# Altium PCB Shopping_Cart.PcbDoc (part 2 of 2)
Units mil, origin at the board's own origin, x right, y up, seen from the top; angles counter-clockwise.
Board outline 3350 x 1865 mil, 2 copper layers (Top Layer, Bottom Layer); 76 components, 56 nets, 246 pads, 179 vias.
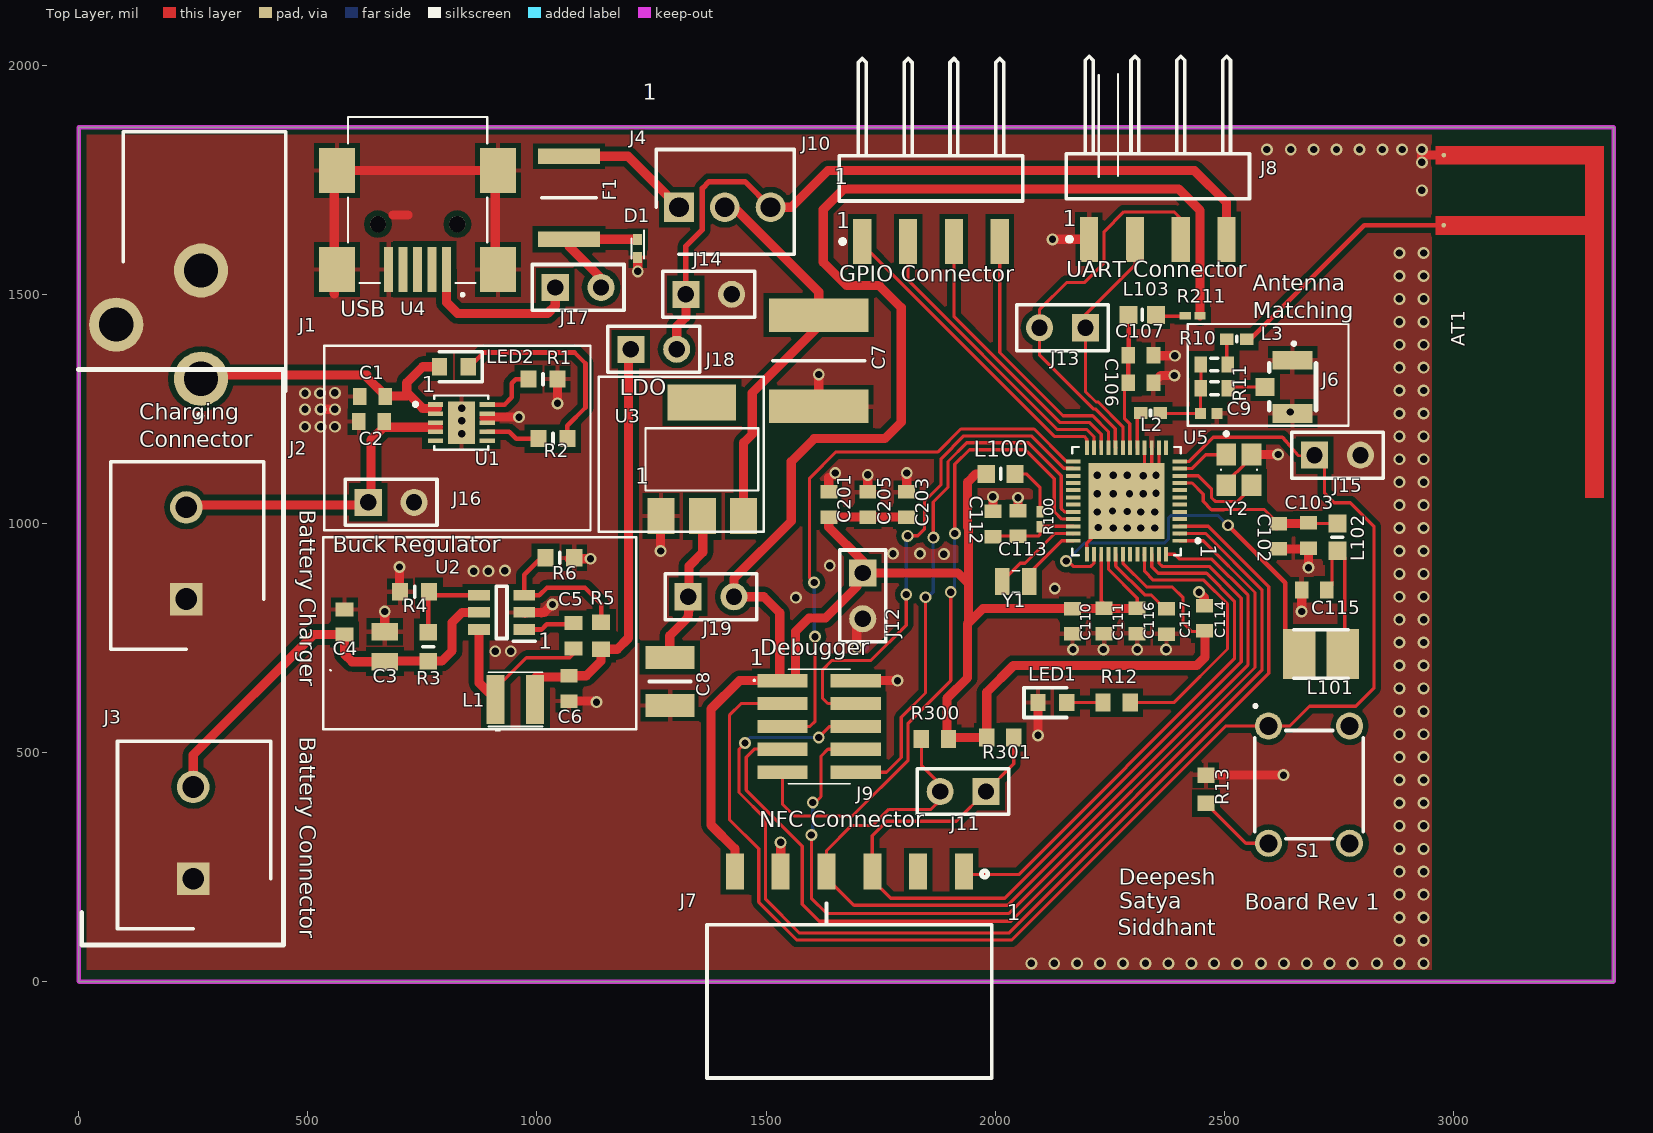
[diagram p0: Top Layer view]

## Silkscreen, mask and mechanical layers (free items; w line width, h text height) (continued)
Top Overlay: (continued)
  lines w5: 549,680 550,679 ; 2226,1756 2226,1978 ; 2268,1758 2268,1980 ; 2420,1280 2420,1213 2528.38,1213 2771,1213 2771,1435 2467,1435 2420,1435 2420,1396.25 ; 2420.04,1277.35 2420.04,1395.25 ; 534,551 534,970 1110,970 1130,970 1217,970 1217,551 534,551 ; 536,985 1117,985 1117,1388 536,1388 536,985 ; 1135,982 1232,982 1495,982 1495,1320 1190,1320 1135,1320 1135,982
  lines w10: -1,1336 447,1336 447,80 7,80 7,151
  text "1" at 1231,1913 h60
  text "1" at 1649,1728 h60
  text "1" at 2147,1637 h60
  text "1" at 1653,1632 h60
  text "UART Connector" at 2155.61,1525.61 h60
  text "GPIO Connector" at 1660,1515 h60
  text "USB" at 571,1439 h60
  text "Antenna  / Matching" at 2562,1436 h60
  text "1" at 749,1274 h60
  text "LDO" at 1181,1268 h60
  text "Charging  / Connector" at 132,1154 h60
  text "1" at 1215,1075 h60
  text "Battery Charger" at 470,1030 h60 r270
  text "1" at 2437,955 h60 r270
  text "Buck Regulator" at 555,925 h60
  text "1" at 1003,714 h60
  text "Debugger" at 1487,700 h60
  text "1" at 1464,679 h60
  text "Battery Connector" at 470,535 h60 r270
  text "NFC Connector" at 1485,325 h60
  text "Deepesh" at 2270,200 h60
  text "Satya" at 2271,147 h60
  text "Board Rev 1" at 2545,145 h60
  text "1" at 2025,122 h60
  text "Siddhant" at 2267,89 h60
Bottom Overlay:
  text "PD12" at 1735,1830 h60 r90
  text "PD15" at 2040,1830 h60 r90
  text "PD13" at 1840,1825 h60 r90
  text "PD14" at 1935,1825 h60 r90
  text "1-2  VUSB / 2-3 BUCK" at 1266,1815.98 h60 r180
  text "GND" at 2225,1795 h60 r90
  text "TX" at 2320,1795 h60 r90
  text "RX" at 2430,1795 h60 r90
  text "5V" at 2525,1790 h60 r90
  text "USB ISO" at 980,1596 h60 r180
  text "5V" at 1279,1582 h60 r180
  text "GND" at 1386,1577 h60 r180
  text "U-TX" at 2017,1520 h60 r180
  text "U-RX" at 2160,1519 h60 r180
  text "5V  ISO" at 1169,1458 h60 r180
  text "RESET" at 2561,1228 h60 r180
  text "GND" at 2752,1223 h60 r180
  text "VBAT+" at 30,1152 h60 r180
  text "VBAT ISO" at 578,1128 h60 r180
  text "GND" at 45,954 h60 r180
  text "3V3" at 1671,947 h60 r90
  text "3V3 ISO" at 1284,944 h60 r180
  text "GND" at 1670,836 h60 r90
  text "VIN" at 46,519 h60 r180
  text "SCL" at 1937,496 h60 r180
  text "SDA" at 1809,494 h60 r180
  text "GND" at 37,313 h60 r180
  text "GND" at 1550,189 h60 r90
  text "3V3" at 1451,185 h60 r90
  text "SDA" at 1649,178 h60 r90
  text "SCL" at 1753,178 h60 r90
  text "VOUT" at 1851,170 h60 r90
  text "FD" at 1959,167 h60 r90
Mechanical 16:
  drawing of 1873 lines, arcs and shapes, not listed
  text "1" at -454,3338 h78.74
  text "2" at 2406,3338 h78.74
  text "3" at 5286,3338 h78.74
  text "4" at 8156,3338 h78.74
  text "A" at -1806,2432 h78.74
  text "A" at 9494,2432 h78.74
  text "B" at -1806,540 h78.74
  text "C" at -1806,-1370 h78.74
  text "ENGINEER:" at 4969,-2827 h78.74
  text "PCB DESIGNER:" at 4969,-3122 h78.74
  text "D" at -1806,-3260 h78.74
  text "D" at 9494,-3260 h78.74
  text "DATE:" at 4969,-3427 h78.74
  text "PART NO.:" at 6469,-3427 h78.74
  text "REV:" at 8569,-3427 h78.74
  text "Altium Limited" at 3669,-3527 h78.74
  text ".PRINT_DATE" at 5019,-3547 h78.74
  text "12a Rodborough Rd" at 3669,-3627 h78.74
  text "Frenchs Forest" at 3669,-3727 h78.74
  text "FILE NAME:" at 4969,-3727 h78.74
  text "DWG NO:" at 6469,-3727 h78.74
  text "SCALE:" at 8569,-3727 h78.74
  text "NSW 2086" at 3669,-3827 h78.74
  text ".PCB_FILE_NAME_NO_PATH" at 5019,-3847 h78.74
  text "1" at -454,-4062 h78.74
  text "2" at 2406,-4062 h78.74
  text "3" at 5286,-4062 h78.74
  text "4" at 8156,-4062 h78.74

## Text inside footprints (layer, text, board x,y; h text height)
U4: Mechanical 13 "PCB EDGE" at 562.27,1912.52 h50 r180